# EAGLE board BPW5006-PS2_1.2 (EAGLE 5.10)
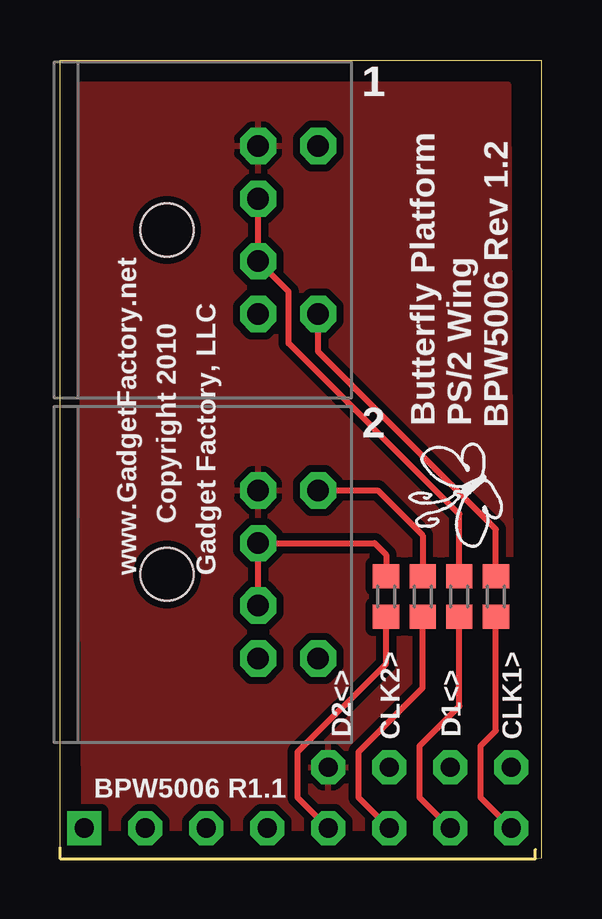
[diagram p0: board, top side]
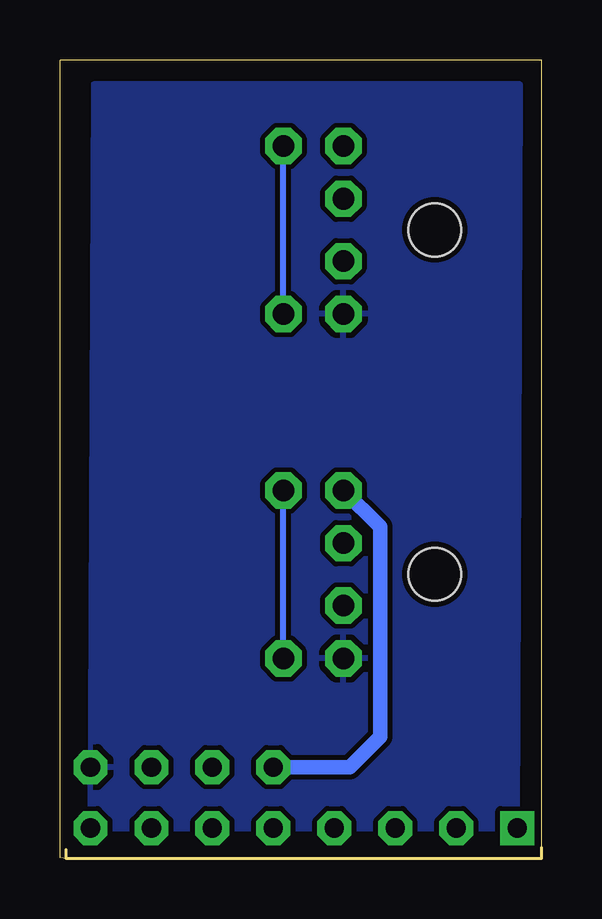
[diagram p1: board, bottom side, seen from below]

Size 20.07 x 33.27 mm. Coordinates in mm from the lower left corner, seen from the top.
Outline: 0,0 19.81,0 20.07,0.03 20.07,33.27 0,33.27 0,0
Copper layers (1*16): Top 0.035mm / dielectric 1.5mm / Bottom 0.035mm
Design rules "SparkFun_Derived_GoldePheonix_10mil *": minimum track width 10mil, minimum drill 15mil, track to track 8mil, track to pad 8mil, pad to pad 8mil, via to via 8mil, smd to smd 8mil, copper to edge 10mil, drill to drill 8mil, minimum pad ring 12mil, minimum via ring 10mil, stop-mask expansion 4mil, vias tented up to drill 18mil, thermal gap 10mil

## Footprints (pad centres in the part's own frame; a part is rotated, then mirrored left to right if it is on the bottom)
PS/2 = drill 0.9 octagon: P$1 -1.27,0; P$2 1.33,0; P$3 -3.47,0; P$4 3.53,0; P$5 -3.47,-2.5; P$6 3.53,-2.5 | hole 2.2: 0.03,3.8
WING_8BIT = drill 0.8 octagon: 2V5@2 16.51,3.81; 3V3@2 13.97,3.81; 5V@2 11.43,3.81; B2 3.81,1.27; B3 6.35,1.27; B4 8.89,1.27; B5 11.43,1.27; B6 13.97,1.27; B7 16.51,1.27; B8 19.05,1.27; GND@2 19.05,3.81 | drill 0.8 square: B1 1.27,1.27
R0603 = smd 1 x 1.1: 1 -0.85,0; 2 0.85,0

## Placement (x,y rotation side)
E$1  [PS/2]  8.26,26.16 90 top
E$2  [PS/2]  8.26,11.81 90 top
E$3  [WING_8BIT]  -0.25,0 0 top
E$4  [BUTTERFLY_LOGO]  17.02,15.24 90 top
R1  [R0603]  13.59,10.92 270 top
R2  [R0603]  15.11,10.92 270 top
R3  [R0603]  16.64,10.92 270 top
R4  [R0603]  18.16,10.92 270 top

## Library data of the parts
E$1 E$2 = GadgetFactory
E$3 = GadgetFactory_Pub
E$4 = usb1
R1-R4 = rcl

## Nets
5V: E$1.P$4 E$2.P$4 E$3.5V@2
GND: E$1.P$3 E$2.P$3 E$3.GND@2
S$1: E$2.P$1 E$2.P$2 R1.1
S$2: E$3.B8 R4.2
S$3: E$3.B7 R3.2
S$4: E$2.P$5 E$2.P$6 R2.1
S$5: E$1.P$1 E$1.P$2 R3.1
S$6: E$1.P$5 E$1.P$6 R4.1
S$7: E$3.B6 R2.2
S$8: E$3.B5 R1.2

## Tracks (layer width: path | path; a pad name or v marks a point on that pad's centre or on a via)
5V
  Bottom 0.61: E$2.P$4 6.73,13.82 6.73,5.08 8,3.81 E$3.5V@2
  pour Top (isolate 0.305): 1.02,1.27 0.89,32.26 18.67,32.26 18.8,1.27
GND
  pour Bottom (rank 2): 1.02,1.27 0.89,32.26 18.67,32.26 18.8,1.27
S$1
  Top 0.254: E$2.P$1 E$2.P$2 13.11,13.14 13.59,12.66 R1.1
S$2
  Top 0.254: E$3.B8 17.53,2.54 17.53,4.7 18.16,5.33 R4.2
S$3
  Top 0.254: E$3.B7 14.99,2.54 14.99,4.7 16.64,6.35 R3.2
S$4
  Top 0.254: E$2.P$6 13.23,15.34 15.11,13.46 R2.1
  Bottom 0.254: E$2.P$5 E$2.P$6
S$5
  Top 0.254: E$1.P$2 E$1.P$1 9.53,23.62 9.53,21.46 16.64,14.35 R3.1
S$6
  Top 0.254: E$1.P$5 10.76,21.12 18.16,13.72 R4.1
  Bottom 0.254: E$1.P$5 E$1.P$6
S$7
  Top 0.254: E$3.B6 12.45,2.54 12.45,4.45 15.11,7.11 R2.2
S$8
  Top 0.254: R1.2 13.59,8.13 9.91,4.45 9.91,2.54 E$3.B5

## Text on the board
tPlace: 1 | 2 | Butterfly Platform | PS/2 Wing | BPW5006 Rev 1.2 | Copyright 2010 | www.GadgetFactory.net | Gadget Factory, LLC | CLK2> | CLK1> | D2<> | D1<> | BPW5006 R1.1